# Altium PCB PCB.PcbDoc (part 2 of 2)
Units mil, origin at the board's own origin, x right, y up, seen from the top; angles counter-clockwise.
Board outline 2345 x 4805 mil, 4 copper layers (Top Layer, GND, POWER, Bottom Layer), stack 30.634 mil thick; 165 components, 153 nets, 527 pads, 283 vias.
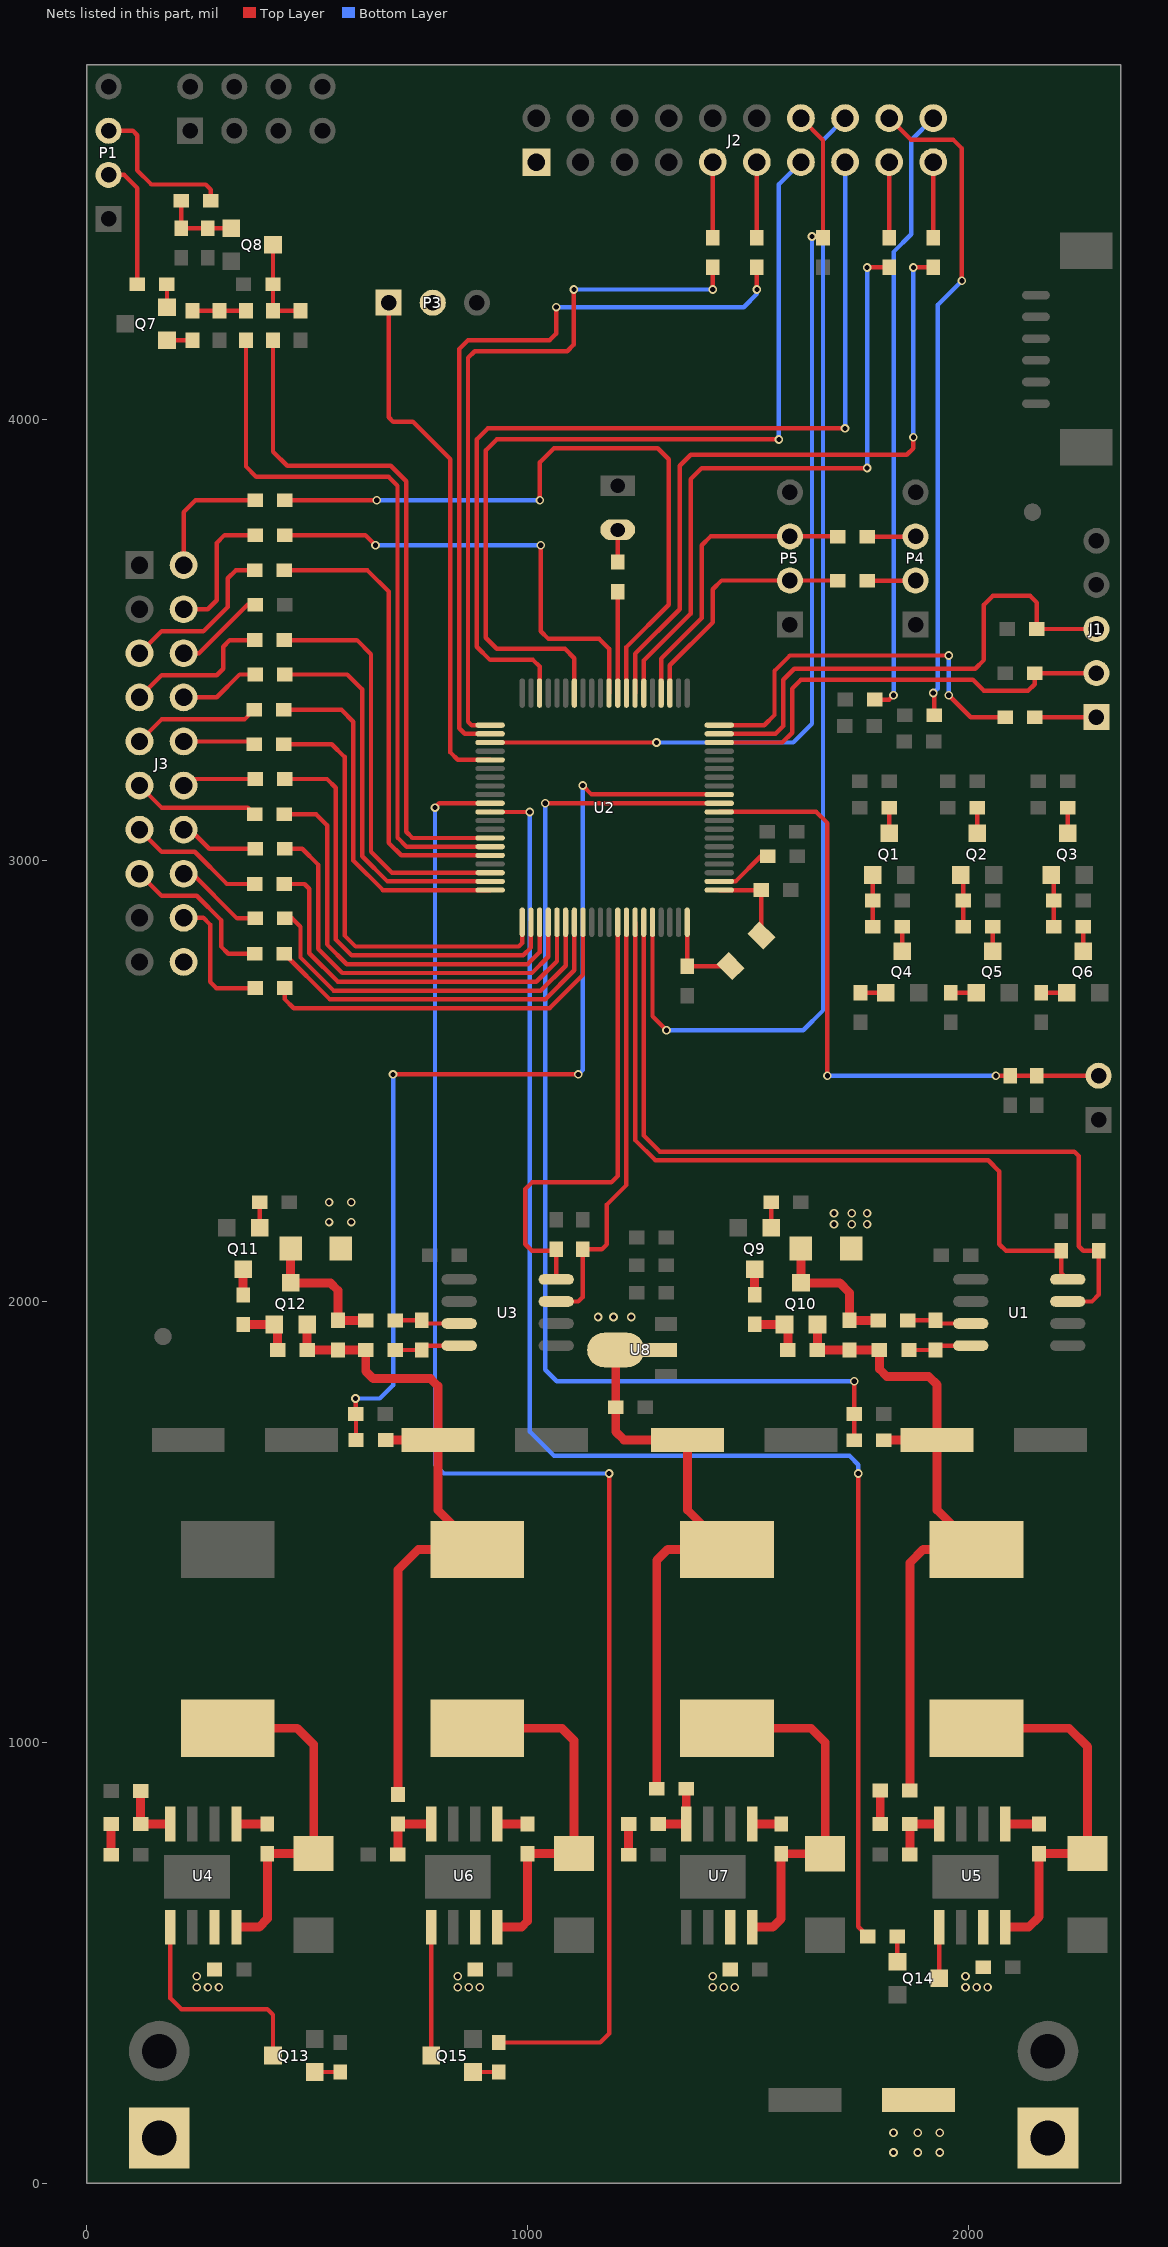
[diagram p4: the nets of this part, all layers, seen from the top]

## Via types
v1: diameter 19.68, hole 11.81, Top Layer to Bottom Layer, tented both sides, 271 vias
v2: diameter 32, hole 16, Top Layer to Bottom Layer, 12 vias

## Nets (pads, with @x,y where several pads share a name; then routed paths per layer and width w, separated by ;. In a path a pad name is that pad's centre, name@x,y a point inside that pad or via, vN(x,y) a via of type N, cw(c..) or ccw(c..) an arc to the next point about the centre after c; other vN are vias at no path point) (continued)
INA1_SCL: R22.2 U1.4 U2.54 | length 1732
  Top Layer w10: U2.54@1243.9,2860.16 1243.9,2366.1 1290,2320 2045,2320 2070,2295 2070,2130 2085,2115 R22.2@2210,2115 2210,2065 U1.4@2225,2050
INA1_SDA: R23.2 U1.3 U2.55 | length 1919.7
  Top Layer w10: U2.55@1263.58,2860.16 1263.58,2376.42 1300,2340 2240,2340 2250,2330 2250,2125 2260,2115 R23.2@2295,2115 2295,2015 2280,2000 U1.3@2225,2000
INA2_SCL: R42.2 U2.52 U3.4 | length 1063.6
  Top Layer w10: U3.4@1065,2050 1065,2115 1010,2115 995,2130 995,2255 1010,2270 1190,2270 1204.53,2284.53 U2.52@1204.53,2860.16
INA2_SDA: R46.2 U2.53 U3.3 | length 980.6
  Top Layer w10: U3.3@1065,2000 1115,2000 1125,2010 R46.2@1125,2118 1168,2118 1180,2130 1180,2220 1224.21,2264.21 U2.53@1224.21,2860.16
IO1: R45.2 U2.39 | length 882
  Top Layer w10: R45.2@449,3421.91 591.18,3421.91 625,3388.09 625,3010 682.32,2952.68 U2.39@915.16,2952.68
IO2: R48.2 U2.41 | length 1018.8
  Top Layer w10: R48.2@447,3263.87 556.13,3263.87 585,3235 585,2830 610,2805 980,2805 987.99,2812.99 U2.41@987.99,2860.16
IO3: R50.2 U2.42 | length 990.6
  Top Layer w10: R50.2@449,3184.85 545.15,3184.85 565,3165 565,2820.96 600.96,2785 990,2785 1007.68,2802.68 U2.42@1007.68,2860.16
IO4: R52.2 U2.44 | length 920.1
  Top Layer w10: R52.2@449,3026.82 489.07,3026.82 525,2990.89 525,2800 580,2745 1010,2745 1047.05,2782.05 U2.44@1047.05,2860.16
IO5: R53.2 U2.46 | length 868.4
  Top Layer w10: R53.2@449,2868.78 466.22,2868.78 485,2850 485,2780 560,2705 1030,2705 1086.42,2761.42 U2.46@1086.42,2860.16
IO6: R57.2 U2.48 | length 861
  Top Layer w10: R57.2@449,2710.75 449,2686 470,2665 1050,2665 1125.79,2740.79 U2.48@1125.79,2860.16
IO7: R58.1 U2.36 | length 1068.7
  Top Layer w10: R58.1@448,3657.96 637.04,3657.96 685,3610 685,3040 713.27,3011.73 U2.36@915.16,3011.73
IO8: R40.1 U2.38 | length 948.1
  Top Layer w10: R40.1@448,3499.93 613.07,3499.93 645,3468 645,3020 692.64,2972.36 U2.38@915.16,2972.36
IO9: R44.1 U2.40 | length 822.1
  Top Layer w10: R44.1@447,3341.89 578.11,3341.89 605,3315 605,3000 672.01,2932.99 U2.40@915.16,2932.99
IO10: R47.1 U2.43 | length 957.6
  Top Layer w10: R47.1@448,3104.84 520.49,3104.84 545.33,3080 545.33,2809.67 590,2765 1000,2765 1027.36,2792.36 U2.43@1027.36,2860.16
IO11: R49.1 U2.45 | length 904.4
  Top Layer w10: R49.1@448,2946.8 495,2946.8 495,2946.1 505,2936.1 505,2790 570,2725 1020,2725 1066.73,2771.73 U2.45@1066.73,2860.16
IO12: R51.1 U2.47 | length 837.5
  Top Layer w10: R51.1@448,2788.76 551.76,2685 1040,2685 1106.1,2751.1 U2.47@1106.1,2860.16
IR_R: C1.1 Q8.3 R10.2 R31.2 | length 211.8
  Top Layer w10: Q8.3@422.75,4396.51 R10.2@422.75,4306.51 R31.2@422.75,4247 C1.1@485,4247
IR_T: R18.1 R19.1 R30.2 | length 121.5
  Top Layer w10: R19.1@240,4247 R18.1@301.25,4247 R30.2@361.5,4247
KEY_OPEN: R38.2 U2.8 | length 1550.4
  Top Layer w10: R38.2@449,3817 v1(658,3817) ; v1(1028,3817) 1028,3903 1060,3935 1295,3935 1320,3910 1320,3580 1224.21,3484.21 U2.8@1224.21,3379.84
  Bottom Layer w10: v1(658,3817) v1(1028,3817)
KEY_OPEN1: R39.2 U2.10 | length 1057.2
  Top Layer w10: R39.2@449,3737.98 632.02,3737.98 v1(655,3715) ; v1(1030,3715) 1030,3520 1047.5,3502.5 1162.5,3502.5 1184.84,3480.16 U2.10@1184.84,3379.84
  Bottom Layer w10: v1(655,3715) v1(1030,3715)
LED: R68.1 U2.9 | length 230.2
  Top Layer w10: U2.9@1204.53,3379.84 R68.1@1204.53,3610
LED_IRQ_CTL: J2.16 U2.56 | length 2676.4
  Top Layer w10: U2.56@1283.27,2860.16 1283.27,2646.73 v1(1315,2615)
  Bottom Layer w10: v1(1315,2615) 1625,2615 1670,2660 1670,4633.74 J2.16@1720,4683.74
LED_TEST_Diode: P6.2 R88.2 R89.2 U2.70 | length 1443.6
  Top Layer w10: U2.70@1434.84,3110.16 1654.84,3110.16 1680,3085 v1(1680,2512) ; v1(2062,2512) R89.2@2095,2512 R88.2@2155,2512 P6.2@2295,2512
  Bottom Layer w10: v1(1680,2512) v1(2062,2512)
MOTO_B: J2.18 R21.2 | length 1506.9
  Top Layer w10: J2.18@1820,4683.74 1868.74,4635 1965,4635 1985,4615 v1(1985,4315) ; v1(1920,3380) 1922,3378 R21.2@1922,3329.33
  Bottom Layer w10: v1(1920,3380) 1930,3390 1930,4260 v1(1985,4315)
MOTO_R: J2.20 R20.2 | length 1393.2
  Top Layer w10: R20.2@1787,3365 1820,3365 v1(1830,3375)
  Bottom Layer w10: v1(1830,3375) 1830,4380 1870,4420 1870,4633.74 J2.20@1920,4683.74
NB_PWRKEY: J2.15 U2.18 | length 2140.3
  Top Layer w10: U2.18@1027.36,3379.84 1027.36,3440 1012.36,3455 915,3455 885,3485 885,3955 910,3980 v1(1720,3980)
  Bottom Layer w10: v1(1720,3980) J2.15@1720,4583.74
NB_RST: J2.13 U2.14 | length 2049.1
  Top Layer w10: U2.14@1106.1,3379.84 1106.1,3458.9 1085,3480 930,3480 905,3505 905,3930 930,3955 v1(1570,3955)
  Bottom Layer w10: v1(1570,3955) 1570,4533.74 J2.13@1620,4583.74
NB_RXD: J2.11 R62.2 | length 171.7
  Top Layer w10: R62.2@1520,4412 J2.11@1520,4583.74
NB_TXD: J2.9 R61.2 | length 171.7
  Top Layer w10: R61.2@1420,4412 J2.9@1420,4583.74
NetC3_1: C3.1 Q8.1 R24.1 R29.2 | length 175.9
  Top Layer w10: R24.1@215,4496.51 R29.2@215,4433.91 C3.1@275,4433.91 Q8.1@328.26,4433.91
NetC4_1: C4.1 R27.2 U1.7 | length 145.9
  Top Layer w10: R27.2@1862,1957 C4.1@1925,1957 1932,1950 U1.7@2005,1950
NetC4_2: C4.2 R35.2 U1.8 | length 144.1
  Top Layer w10: R35.2@1865,1890 C4.2@1925,1890 1935,1900 U1.8@2005,1900
NetC8_1: C8.1 U2.62 | length 133.4
  Top Layer w10: U2.62@1434.84,2952.68 1471.79,2952.68 1529.11,3010 C8.1@1544.51,3010
NetC9_1: C9.1 R54.2 U3.7 | length 147.9
  Top Layer w10: R54.2@700,1957 C9.1@760,1957 767,1950 U3.7@845,1950
NetC9_2: C9.2 R64.2 U3.8 | length 149.1
  Top Layer w10: R64.2@700,1890 C9.2@760,1890 770,1900 U3.8@845,1900
NetC11_1: C11.1 D4.2 L1.1 U4.8 | length 788.2
  Top Layer w20: L1.1@320,1032.24 477.76,1032.24 515,995 D4.2@515,748 C11.1@410,748 410,600 391.14,581.14 U4.8@340,581.14
NetC11_2: C11.2 U4.1 | length 70
  Top Layer w20: U4.1@340,815 C11.2@410,815
NetC14_1: C14.1 D5.2 L2.1 U5.8 | length 850.7
  Top Layer w20: L2.1@2018.33,1032.24 2227.76,1032.24 2270,990 D5.2@2270,748 C14.1@2160,748 2160,605 2136.14,581.14 U5.8@2083.33,581.14
NetC14_2: C14.2 U5.1 | length 76.7
  Top Layer w20: U5.1@2083.33,815 C14.2@2160,815
NetC17_1: C17.1 D6.2 L3.1 U6.8 | length 819.2
  Top Layer w20: L3.1@886.11,1032.24 1077.76,1032.24 1105,1005 D6.2@1105,748 C17.1@1000,748 1000,595 986.14,581.14 U6.8@931.67,581.14
NetC17_2: C17.2 U6.1 | length 68.3
  Top Layer w20: U6.1@931.67,815 C17.2@1000,815
NetC20_1: C20.1 D7.2 L4.1 U7.8 | length 809.7
  Top Layer w20: L4.1@1452.22,1032.24 1642.76,1032.24 1675,1000 D7.2@1675,747.5 1575.5,747.5 C20.1@1575,748 1575,600 1556.14,581.14 U7.8@1510,581.14
NetC20_2: C20.2 U7.1 | length 65
  Top Layer w20: U7.1@1510,815 C20.2@1575,815
NetD1_1: D1.1 Q10.3 R27.1 R33.2 | length 325
  Top Layer w20: D1.1@1620,2120 Q10.3@1620,2042.24 1707.76,2042.24 1730,2020 R33.2@1730,1957 R27.1@1795,1957
NetD2_1: D2.1 Q12.3 R54.1 R60.2 | length 323.3
  Top Layer w20: D2.1@462.6,2120 Q12.3@462.6,2042.24 552.76,2042.24 570,2025 R60.2@570,1957 R54.1@633,1957
NetD3_2: D3.2 R68.2 | length 73
  Top Layer w10: R68.2@1204.53,3677 D3.2@1204.53,3750
NetJ1_1: J1.1 R36.2 | length 140
  Top Layer w10: R36.2@2150,3325 J1.1@2290,3325
NetJ3_2: J3.2 R38.1 | length 293.2
  Top Layer w10: J3.2@220,3670 220,3790 247,3817 R38.1@382,3817
NetJ3_4: J3.4 R39.1 | length 307.7
  Top Layer w10: J3.4@220,3570 275,3570 295,3590 295,3720 312.98,3737.98 R39.1@382,3737.98
NetJ3_5: J3.5 R58.2 | length 376.9
  Top Layer w10: J3.5@120,3470 170,3520 265,3520 320,3575 320,3640 337.96,3657.96 R58.2@381,3657.96
NetJ3_6: J3.6 R41.1 | length 207.5
  Top Layer w10: J3.6@220,3470 255,3470 364.94,3579.94 R41.1@382,3579.94
NetJ3_7: J3.7 R40.2 | length 344.1
  Top Layer w10: J3.7@120,3370 170,3420 295,3420 310,3435 310,3485 324.93,3499.93 R40.2@381,3499.93
NetJ3_8: J3.8 R45.1 | length 183.5
  Top Layer w10: J3.8@220,3370 295,3370 346.91,3421.91 R45.1@382,3421.91
NetJ3_9: J3.9 R44.2 | length 289.8
  Top Layer w10: J3.9@120,3270 170,3320 358.11,3320 R44.2@380,3341.89
NetJ3_10: J3.10 R48.1 | length 162.5
  Top Layer w10: J3.10@220,3270 373.87,3270 R48.1@380,3263.87
NetJ3_11: J3.11 R47.2 | length 288
  Top Layer w10: J3.11@120,3170 170,3120 365.84,3120 R47.2@381,3104.84
NetJ3_12: J3.12 R50.1 | length 168.2
  Top Layer w10: J3.12@220,3170 234.85,3184.85 R50.1@382,3184.85
NetJ3_13: J3.13 R49.2 | length 312
  Top Layer w10: J3.13@120,3070 170,3020 245,3020 318.2,2946.8 R49.2@381,2946.8
NetJ3_14: J3.14 R52.1 | length 179.9
  Top Layer w10: J3.14@220,3070 235,3070 278.18,3026.82 R52.1@382,3026.82
NetJ3_15: J3.15 R51.2 | length 371.2
  Top Layer w10: J3.15@120,2970 170,2920 250,2920 305,2865 305,2805 321.24,2788.76 R51.2@381,2788.76
NetJ3_16: J3.16 R53.1 | length 203.9
  Top Layer w10: J3.16@220,2970 240,2970 341.22,2868.78 R53.1@382,2868.78
NetJ3_18: J3.18 R57.1 | length 304.1
  Top Layer w10: J3.18@220,2870 265,2870 280,2855 280,2725 294.25,2710.75 R57.1@382,2710.75
NetP1_2: P1.2 R17.2 | length 296
  Top Layer w10: P1.2@50,4555 85,4555 115.24,4524.76 R17.2@115.24,4306.51
NetP1_3: P1.3 R24.2 | length 358.9
  Top Layer w10: P1.3@50,4655 105,4655 115,4645 115,4565 147,4533 270,4533 282,4521 R24.2@282,4496.51
NetP4_2: P4.2 R69.1 | length 110.2
  Top Layer w10: R69.1@1770,3634.5 1879.5,3634.5 P4.2@1880,3635
NetP4_3: P4.3 R67.1 | length 110.2
  Top Layer w10: R67.1@1770,3734.5 1879.5,3734.5 P4.3@1880,3735
NetQ1_1: Q1.1 R1.1 R7.1 | length 117.9
  Top Layer w10: Q1.1@1782.6,2967.24 1783,2966.84 R1.1@1783,2909.49 R7.1@1783,2849.49
NetQ1_3: Q1.3 R3.1 | length 57.8
  Top Layer w10: Q1.3@1820,3061.73 R3.1@1820,3119.49
NetQ2_1: Q2.1 R2.1 R8.1 | length 120
  Top Layer w10: Q2.1@1982.6,2967.24 1988,2961.84 R2.1@1988,2909.49 R8.1@1988,2849.49
NetQ2_3: Q2.3 R4.1 | length 57.8
  Top Layer w10: Q2.3@2020,3061.73 R4.1@2020,3119.49
NetQ3_1: Q3.1 R5.1 R9.1 | length 120
  Top Layer w10: Q3.1@2187.6,2967.24 2193,2961.84 R5.1@2193,2909.49 R9.1@2193,2849.49
NetQ3_3: Q3.3 R6.1 | length 57.8
  Top Layer w10: Q3.3@2225,3061.73 R6.1@2225,3119.49
NetQ4_1: Q4.1 R14.2 | length 57.6
  Top Layer w10: R14.2@1755,2700 Q4.1@1812.6,2700
NetQ4_3: Q4.3 R7.2 | length 55
  Top Layer w10: Q4.3@1850,2794.49 R7.2@1850,2849.49
NetQ5_1: Q5.1 R15.2 | length 57.6
  Top Layer w10: R15.2@1960,2700 Q5.1@2017.6,2700
NetQ5_3: Q5.3 R8.2 | length 55
  Top Layer w10: Q5.3@2055,2794.49 R8.2@2055,2849.49
NetQ6_1: Q6.1 R16.2 | length 57.6
  Top Layer w10: R16.2@2165,2700 Q6.1@2222.6,2700
NetQ6_3: Q6.3 R9.2 | length 55
  Top Layer w10: Q6.3@2260,2794.49 R9.2@2260,2849.49
NetQ7_1: Q7.1 R19.2 | length 57.8
  Top Layer w10: Q7.1@182.24,4180 R19.2@240,4180
NetQ7_2: Q7.2 R17.1 | length 51.7
  Top Layer w10: Q7.2@182.24,4254.8 R17.1@182.24,4306.51
NetQ9_1: Q9.1 R32.1 | length 57.8
  Top Layer w10: Q9.1@1552.4,2167.24 R32.1@1552.4,2225
NetQ9_3: Q9.3 R28.2 | length 57.8
  Top Layer w20: R28.2@1515,2015 Q9.3@1515,2072.76
NetQ10_1: Q10.1 R28.1 R34.1 | length 128.7
  Top Layer w20: R28.1@1515,1948 1515.24,1947.76 Q10.1@1582.6,1947.76 1590.4,1939.95 R34.1@1590.4,1890
NetQ11_1: Q11.1 R59.1 | length 57.8
  Top Layer w10: Q11.1@392.4,2167.24 R59.1@392.4,2225
NetQ11_3: Q11.3 R55.2 | length 58
  Top Layer w20: R55.2@355,2014.76 Q11.3@355,2072.76
NetQ12_1: Q12.1 R55.1 R63.1 | length 131.2
  Top Layer w20: R55.1@355,1947.76 Q12.1@425.2,1947.76 433,1939.95 R63.1@433,1890
NetQ13_1: Q13.1 R70.2 | length 57.8
  Top Layer w10: Q13.1@517.24,252.6 R70.2@575,252.6
NetQ13_3: Q13.3 U4.5 | length 501.8
  Top Layer w10: U4.5@190,581.14 190,420 215,395 410,395 422.76,382.24 Q13.3@422.76,290
NetQ14_1: Q14.1 R75.2 | length 57.6
  Top Layer w10: Q14.1@1838.84,502.4 R75.2@1838.84,560
NetQ14_3: Q14.3 U5.5 | length 116.1
  Top Layer w10: Q14.3@1933.33,465 U5.5@1933.33,581.14
NetQ15_1: Q15.1 R81.2 | length 58.8
  Top Layer w10: Q15.1@876.15,252.6 R81.2@935,252.6
NetQ15_3: Q15.3 U6.5 | length 291.1
  Top Layer w10: Q15.3@781.67,290 U6.5@781.67,581.14
NetR71_2: R71.2 R72.1 | length 70
  Top Layer w20: R71.2@55.49,745 R72.1@55.49,815
NetR72_2: R72.2 R73.1 U4.4 | length 142.5
  Top Layer w20: R73.1@122.49,890 R72.2@122.49,815 U4.4@190,815
NetR77_2: R77.2 R78.1 U5.4 | length 135.3
  Top Layer w20: R77.2@1867,746 R78.1@1867,815 U5.4@1933.33,815
NetR78_2: R78.2 R79.1 | length 76
  Top Layer w20: R78.2@1800,815 R79.1@1800,891
NetR82_2: R82.2 R83.1 U6.4 | length 144.7
  Top Layer w20: R82.2@706,746 R83.1@706,815 U6.4@781.67,815
NetR85_2: R85.2 R86.1 | length 70
  Top Layer w20: R85.2@1229,745 R86.1@1229,815
NetR86_2: R86.2 R87.2 U7.4 | length 144
  Top Layer w20: R86.2@1296,815 U7.4@1360,815 R87.2@1360,895
PWM: P3.1 U2.25 | length 1201.4
  Top Layer w10: P3.1@685,4265 685,4005 695,3995 740,3995 825,3910 825,3245 841.73,3228.27 U2.25@915.16,3228.27
RST_FM: R36.1 U2.80 | length 882.9
  Top Layer w10: U2.80@1434.84,3307.01 1537.01,3307.01 1560,3330 1560,3430 1595,3465 v1(1955,3465) ; v1(1955,3375) 2005,3325 R36.1@2083,3325
  Bottom Layer w10: v1(1955,3375) v1(1955,3465)
SWCLK_FM: J1.2 R37.2 U2.78 | length 1014.3
  Top Layer w10: U2.78@1434.84,3267.64 1577.64,3267.64 1600,3290 1600,3390 1620,3410 2010,3410 2035,3385 2135,3385 2150,3400 R37.2@2150,3425 J1.2@2290,3425
SWDIO_FM: J1.3 R43.2 U2.79 | length 1185.6
  Top Layer w10: U2.79@1434.84,3287.32 1562.32,3287.32 1580,3305 1580,3410 1605,3435 2015,3435 2035,3455 2035,3580 2055,3600 2140,3600 2155,3585 R43.2@2155,3525 J1.3@2290,3525
UART0_RXD: P5.2 R69.2 U2.3 | length 567
  Top Layer w10: U2.3@1322.64,3379.84 1322.64,3442.64 1420,3540 1420,3615 1440,3635 P5.2@1595,3635 1702.5,3635 R69.2@1703,3634.5
UART0_TXD: P5.3 R67.2 U2.4 | length 689.8
  Top Layer w10: U2.4@1302.95,3379.84 1302.95,3457.95 1395,3550 1395,3715 1415,3735 P5.3@1595,3735 1702.5,3735 R67.2@1703,3734.5
UART1_RXD: R31.1 U2.34 | length 1573.8
  Top Layer w10: R31.1@422.75,4180 422.75,3927.25 455,3895 690,3895 725,3860 725,3065 738.9,3051.1 U2.34@915.16,3051.1
UART1_TXD: R30.1 U2.35 | length 1664.7
  Top Layer w10: R30.1@361.5,4180 361.5,3893.5 385,3870 685,3870 705,3850 705,3052.06 725.64,3031.42 U2.35@915.16,3031.42
UART3_RXD: R61.1 U2.21 | length 1620.9
  Top Layer w10: U2.21@915.16,3307.01 872.99,3307.01 865,3315 865,4140 880,4155 1090,4155 1105,4170 v1(1105,4295) ; v1(1420,4295) R61.1@1420,4345
  Bottom Layer w10: v1(1105,4295) v1(1420,4295)
UART3_TXD: R62.1 U2.22 | length 1757.3
  Top Layer w10: U2.22@915.16,3287.32 857.68,3287.32 845,3300 845,4160 865,4180 1050,4180 1065,4195 v1(1065,4255) ; v1(1520,4295) R62.1@1520,4345
  Bottom Layer w10: v1(1065,4255) 1490,4255 1520,4285 v1(1520,4295)
UART4_RXD: R65.1 U2.6 | length 1444.6
  Top Layer w10: U2.6@1263.58,3379.84 1263.58,3453.58 1370,3560 1370,3865 1395,3890 v1(1770,3890) ; v1(1770,4345) R65.1@1820,4345
  Bottom Layer w10: v1(1770,3890) v1(1770,4345)
UART4_TXD: R66.1 U2.7 | length 1558.6
  Top Layer w10: U2.7@1243.9,3379.84 1243.9,3468.9 1345,3570 1345,3895 1370,3920 1860,3920 1875,3935 v1(1875,3960) ; v1(1875,4345) R66.1@1920,4345
  Bottom Layer w10: v1(1875,3960) v1(1875,4345)
UMU_RXD: J2.19 R66.2 | length 171.7
  Top Layer w10: R66.2@1920,4412 J2.19@1920,4583.74
UMU_TXD: J2.17 R65.2 | length 171.7
  Top Layer w10: R65.2@1820,4412 J2.17@1820,4583.74
UMU_WAKE: J2.14 R56.2 U2.23 | length 2171.1
  Top Layer w10: U2.23@915.16,3267.64 v1(1292.36,3267.64) ; J2.14@1620,4683.74 1670,4633.74 R56.2@1670,4412 1667,4415 v1(1645,4415)
  Bottom Layer w10: v1(1292.36,3267.64) 1602.64,3267.64 1645,3310 v1(1645,4415)
VIN_5V: C24.1 C26.1 L4.2 P3.2 R87.1 U8.2 | length 1328.4
  Top Layer w20: U8.2@1200,1890 C24.1@1200,1760 1200,1705 1219,1686 C26.1@1362.75,1686 1362.75,1527.22 L4.2@1452.22,1437.76 1317.76,1437.76 1293,1413 R87.1@1293,895
  other v1: 1160,1965 1195,1965 1235,1965
VIN_24V: C12.1 C15.1 C18.1 C21.1 C22.1 JP1.1 JP2.1 U4.7 U5.7 U6.7 U7.7
  other v1: 1830,70 1885,70 1935,70 1830,115 1885,115 1935,115 250,445 275,445 300,445 841.67,445 866.67,445 891.67,445 1420,445 1445,445 1470,445 1993.33,445 2018.33,445 2043.33,445 250,470 841.67,470 1420,470 1993.33,470
Vout_3V6: C19.1 L3.2 Q12.2 R60.1 R63.2 R64.1 R80.2 R83.2 | length 1651.1
  Top Layer w20: Q12.2@500,1947.76 R63.2@500,1890 R60.1@570,1890 R64.1@633,1890 633,1842 650,1825 780,1825 796.64,1808.36 C19.1@796.64,1686 ; R80.2@678,1686 C19.1@796.64,1686 ; R83.2@706,882 706,1391 752.76,1437.76 L3.2@886.11,1437.76 796.64,1527.22 C19.1@796.64,1686
Vout_3V6_1: D2.2 J3.20
  other v1: 550,2180 600,2180 550,2225 600,2225
Vout_3V6_CHK: R80.1 R84.2 U2.72 | length 2294.3
  Top Layer w10: v1(610,1780) R84.2@610,1745 611,1744 R80.1@611,1686 ; v1(695,2515) v1(1115,2515) ; v1(1125,3170) 1145,3150 1434.37,3150 U2.72@1434.84,3149.53
  Bottom Layer w10: v1(610,1780) 665,1780 695,1810 v1(695,2515) ; v1(1115,2515) 1125,2525 v1(1125,3170)
Vout_3V6_CTL: R81.1 U2.30 | length 3551
  Top Layer w10: v1(790,3120) 799.84,3129.84 U2.30@915.16,3129.84 ; R81.1@935,319.6 1164.6,319.6 1185,340 v1(1185,1610)
  Bottom Layer w10: v1(790,3120) 790,1630 810,1610 v1(1185,1610)
Vout_7V2: C16.1 L2.2 Q10.2 R33.1 R34.2 R35.1 R74.2 R79.2 | length 1598.9
  Top Layer w20: Q10.2@1657.4,1947.76 R34.2@1657.4,1890 R33.1@1730,1890 R35.1@1798,1890 1798,1847 1815,1830 1910,1830 1928.86,1811.14 C16.1@1928.86,1686 ; R74.2@1808,1685 1809,1686 C16.1@1928.86,1686 ; R79.2@1867,891 1867,1407 1897.76,1437.76 L2.2@2018.33,1437.76 1928.86,1527.22 C16.1@1928.86,1686
Vout_7V2_1: D1.2 J2.1
  other v1: 1695,2175 1735,2175 1770,2175 1695,2200 1735,2200 1770,2200
Vout_7V2_CHK: R74.1 R76.2 U2.71 | length 2525.7
  Top Layer w10: v1(1040,3130) 1434.68,3130 U2.71@1434.84,3129.84 ; R74.1@1741,1685 R76.2@1741,1745 v1(1741,1819)
  Bottom Layer w10: v1(1040,3130) 1040,1845 1066,1819 v1(1741,1819)
Vout_7V2_CTL: R75.1 U2.31 | length 3350
  Top Layer w10: U2.31@915.16,3110.16 915.32,3110 v1(1005,3110) ; v1(1750,1610) 1750,581.85 R75.1@1771.84,560
  Bottom Layer w10: v1(1005,3110) 1005,1705 1060,1650 1730,1650 1750,1630 v1(1750,1610)
XT1: C5.1 U2.61 Y1.1 | length 198.1
  Top Layer w10: U2.61@1434.84,2932.99 C5.1@1530,2932.99 Y1.1@1530,2830
XT2: C6.2 U2.60 Y1.2 | length 198.1
  Top Layer w10: U2.60@1362.01,2860.16 C6.2@1362.01,2760.4 Y1.2@1460.4,2760.4
pads on no net: MARK1.0 MARK1.1 MARK2.0 MARK2.1 P4.4 P5.4 P7.7 P7.8 U2.1 U2.2 U2.5 U2.11 U2.12 U2.13 U2.17 U2.19 U2.20 U2.24 U2.33 U2.57 U2.58 U2.59 U2.67 U2.68 U2.69 U4.2 U4.3 U5.2 U5.3 U6.2 U6.3 U7.2 U7.3 U7.5

## Polygon pours and split planes (outlines as drawn)
VIN_24V on Top Layer "24V" (solid, remove dead copper, pour order 0): 270,620 270,520 240,490 240,425 245,420 315,420 325,430 325,520 310,535 310,620
VIN_24V on Top Layer "24V" (solid, remove dead copper, pour order 4): 861.67,620 861.67,520 831.67,490 831.67,425 836.67,420 906.67,420 916.67,430 916.67,520 901.67,535 901.67,620
VIN_24V on Top Layer "24V" (solid, remove dead copper, pour order 6): 1440,620 1440,520 1410,490 1410,425 1415,420 1485,420 1495,430 1495,520 1480,535 1480,620
VIN_24V on Top Layer "24V" (solid, remove dead copper, pour order 8): 2013.33,620 2013.33,520 1983.33,490 1983.33,425 1988.33,420 2058.33,420 2068.33,430 2068.33,520 2053.33,535 2053.33,620
VIN_24V on Top Layer "24V" (solid, remove dead copper, pour order 10): 1800,215 1800,35 2270,35 2270,215
12V on Top Layer "12V" (solid, remove dead copper, pour order 12): 30,870 85,870 85,970 30,970
Vout_3V6_1 on Top Layer "3V6_1" (solid, remove dead copper, pour order 16): 530,2090 530,2255 625,2255 625,2090
12V on Top Layer "12V" (solid, remove dead copper, pour order 20): 425,1370 60,1370 60,1800 320,1800 320,1550 425,1550
VIN_5V on Top Layer "5V" (solid, remove dead copper, pour order 26): 1140,1855 1260,1855 1260,1980 1255,1985 1140,1985
Vout_7V2_1 on Top Layer "7V2_1" (solid, remove dead copper, pour order 28): 1680,2085 1785,2085 1790,2090 1790,2215 1680,2215
3.3V on Top Layer "3V3" (solid, remove dead copper, pour order 30): 1290,2125 1380,2125 1390,2135 1390,2225 1290,2225
GND on Top Layer "GND" (solid, remove dead copper, pour order 38): 0,4805 2345,4805 2345,0 0,0
GND on Bottom Layer "GND" (solid, remove dead copper, pour order 40): 0,4805 2345,4805 2345,0 0,0
GND on GND (split plane): 2324.9,20.1 20.1,20.1 20.1,4784.9 2324.9,4784.9
Vout_7V2_1 on POWER (split plane): 1074.93,4490 1075.22,4487.06 1076.07,4484.23 1077.47,4481.63 1079.34,4479.34 1529.93,4028.76 1529.93,3395 1530.22,3392.06 1531.07,3389.23 1532.47,3386.63 1534.34,3384.34 1536.63,3382.47 1539.23,3381.07 1542.06,3380.22 1545,3379.93 1839.93,3379.93 1839.93,2525 1839.93,2075.07 1645.07,2075.07 1645.07,2180 1645.07,3280 1644.78,3282.94 1643.93,3285.77 1642.53,3288.37 1640.66,3290.66 1638.37,3292.53 1635.77,3293.93 1632.94,3294.78 1630,3295.07 1455.07,3295.07 1455.07,3980 1454.78,3982.94 1453.93,3985.77 1452.53,3988.37 1450.66,3990.66 965.07,4476.24 965.07,4618.76 966.24,4619.93 1074.93,4619.93
Vout_3V6_1 on POWER (split plane): 314.93,2320 315.22,2317.06 316.07,2314.23 317.47,2311.63 319.34,2309.34 321.63,2307.47 324.23,2306.07 327.06,2305.22 330,2304.93 624.93,2304.93 624.93,2060.07 185.07,2060.07 185.07,2809.93 314.93,2809.93
VIN_5V on POWER (split plane): 844.93,3915 845.22,3912.06 846.07,3909.23 847.47,3906.63 849.34,3904.34 851.63,3902.47 854.23,3901.07 857.06,3900.22 860,3899.93 979.93,3899.93 979.93,2065 980.22,2062.06 981.07,2059.23 982.47,2056.63 984.34,2054.34 989.34,2049.34 991.63,2047.47 994.23,2046.07 997.06,2045.22 1000,2044.93 1249.93,2044.93 1249.93,1955.07 890.07,1955.07 890.07,3800 889.78,3802.94 888.93,3805.77 887.53,3808.37 885.66,3810.66 883.37,3812.53 880.77,3813.93 877.94,3814.78 875,3815.07 715.07,3815.07 715.07,4309.93 844.93,4309.93
3.3V on POWER (split plane): 2324.9,575.07 355.07,575.07 355.07,1805 354.78,1807.94 353.93,1810.77 352.53,1813.37 350.66,1815.66 348.37,1817.53 345.77,1818.93 342.94,1819.78 340,1820.07 185.07,1820.07 185.07,2029.93 640,2029.93 642.94,2030.22 645.77,2031.07 648.37,2032.47 650.66,2034.34 652.53,2036.63 653.93,2039.23 654.78,2042.06 655.07,2045 655.07,2320 654.78,2322.94 653.93,2325.77 652.53,2328.37 650.66,2330.66 648.37,2332.53 645.77,2333.93 642.94,2334.78 640,2335.07 345.07,2335.07 345.07,2825 344.78,2827.94 343.93,2830.77 342.53,2833.37 340.66,2835.66 338.37,2837.53 335.77,2838.93 332.94,2839.78 330,2840.07 185.07,2840.07 185.07,2920 184.78,2922.94 183.93,2925.77 182.53,2928.37 180.66,2930.66 178.37,2932.53 175.77,2933.93 172.94,2934.78 170,2935.07 20.1,2935.07 20.1,4784.9 2324.9,4784.9
12V on POWER (split plane): 154.93,2825 154.93,1805 155.22,1802.06 156.07,1799.23 157.47,1796.63 159.34,1794.34 161.63,1792.47 164.23,1791.07 167.06,1790.22 170,1789.93 324.93,1789.93 324.93,575.07 20.1,575.07 20.1,2904.93 154.93,2904.93
VIN_24V on POWER (split plane): 2324.9,20.1 20.1,20.1 20.1,544.93 2324.9,544.93

## Keep-outs
Keep-Out Layer:
  lines w5: 2345,-196.85 2345,0 ; 2345,5001.85 2345,4805 ; 4690,-196.85 4690,0 ; 4690,5001.85 4690,4805 ; 7035,-196.85 7035,0 ; 7035,5001.85 7035,4805 ; 0,0 0,4805 ; 0,0 2345,0 ; 0,0 0,-196.85 9380,-196.85 9380,0 ; 0,4805 2345,4805 ; 0,4805 0,5001.85 9380,5001.85 9380,4805 ; 2345,0 2345,4805 ; 2345,0 4690,0 ; 2345,0 2345,4805 ; 2345,4805 4690,4805 ; 4690,0 4690,4805 ; 4690,0 7035,0 ; 4690,0 4690,4805 ; 4690,4805 7035,4805 ; 7035,0 7035,4805 ; 7035,0 9380,0 ; 7035,0 7035,4805 ; 7035,4805 9380,4805 ; 9380,0 9380,4805

## Other copper
POWER (plane layer: these items are gaps in the copper):
  lines w30: 0,2920 170,2920 170,2825 ; 170,2045 640,2045 640,2320 330,2320 330,2825 170,2825 ; 340,560 340,1805 170,1805 170,2825 ; 2345,590 2345,0 ; 2345,0 0,0 0,560 2340,560 2345,565 2345,0 ; 700,3800 700,4325 860,4325 860,3915 995,3915 995,2065 1000,2060 1260,2060 1265,2055 1265,1940 1130,1940 875,1940 875,3800 700,3800 ; 950,4470 950,4625 960,4635 1090,4635 1090,4490 1545,4035 1545,3395 1855,3395 1855,2525 1855,2060 1670,2060 1630,2060 1630,2180 1630,3280 1440,3280 1440,3980 950,4470

## Silkscreen, mask and mechanical layers (free items; w line width, h text height)
Top Overlay:
  text "IR-" at 105,4735 h30
  text "IR+" at 105,4635 h30
  text "gw1" at 205,4565 h30
  text "gw2" at 305,4565 h30
  text "gw3" at 405,4565 h30
  text "gw4" at 505,4565 h30
  text "IF-" at 105,4535 h30
  text "IF+" at 105,4435 h30
  text "Main" at 1085,4380 h50
  text "MOTOR" at 720,4330 h50
  text "PWM" at 645.01,4175 h30
  text "5V" at 760.01,4175 h30
  text "GND" at 845.01,4175 h30
  text "CARD" at 2095,4070 h50 r90
  text "TXD" at 1525,3700 h30 r90
  text "VCC" at 2230,3685.01 h30 r90
  text "RXD" at 1525,3600 h30 r90
  text "GND" at 2230,3585.01 h30 r90
  text "PC_UART" at 1460,3530 h50 r90
  text "GND" at 1525,3500 h30 r90
  text "DIO" at 2230,3485.01 h30 r90
  text "CLK" at 2230,3385.01 h30 r90
  text "RST" at 2230,3285.01 h30 r90
  text "Reserve" at 625,3053.39 h50 r90
  text "D-" at 2230,2490 h30 r90
  text "D+" at 2230,2385 h30 r90
  text "LED_CHK" at 1975,2300 h50
  text "12V" at 365,900 h50
  text "3V6" at 930,900 h50
  text "5V" at 1495,900 h50
  text "7V2" at 2070,900 h50
  text "GND" at 345,339.99 h30 r270
  text "GND" at 2000,260.01 h30 r90
  text "24V+" at 345,151.3 h30 r270
  text "<--------  Current" at 535,90 h50
  text "24V+" at 2000,55 h30 r90